# Altium PCB Voiture.PcbDoc (part 1 of 2)
Units mm, origin at the board's own origin, x right, y up, seen from the top; angles counter-clockwise.
Board outline 152.4 x 101.6 mm, 2 copper layers (Top Layer, Bottom Layer); 202 components, 170 nets, 599 pads, 88 vias.
Unrouted connection lines stored in the file: 12.
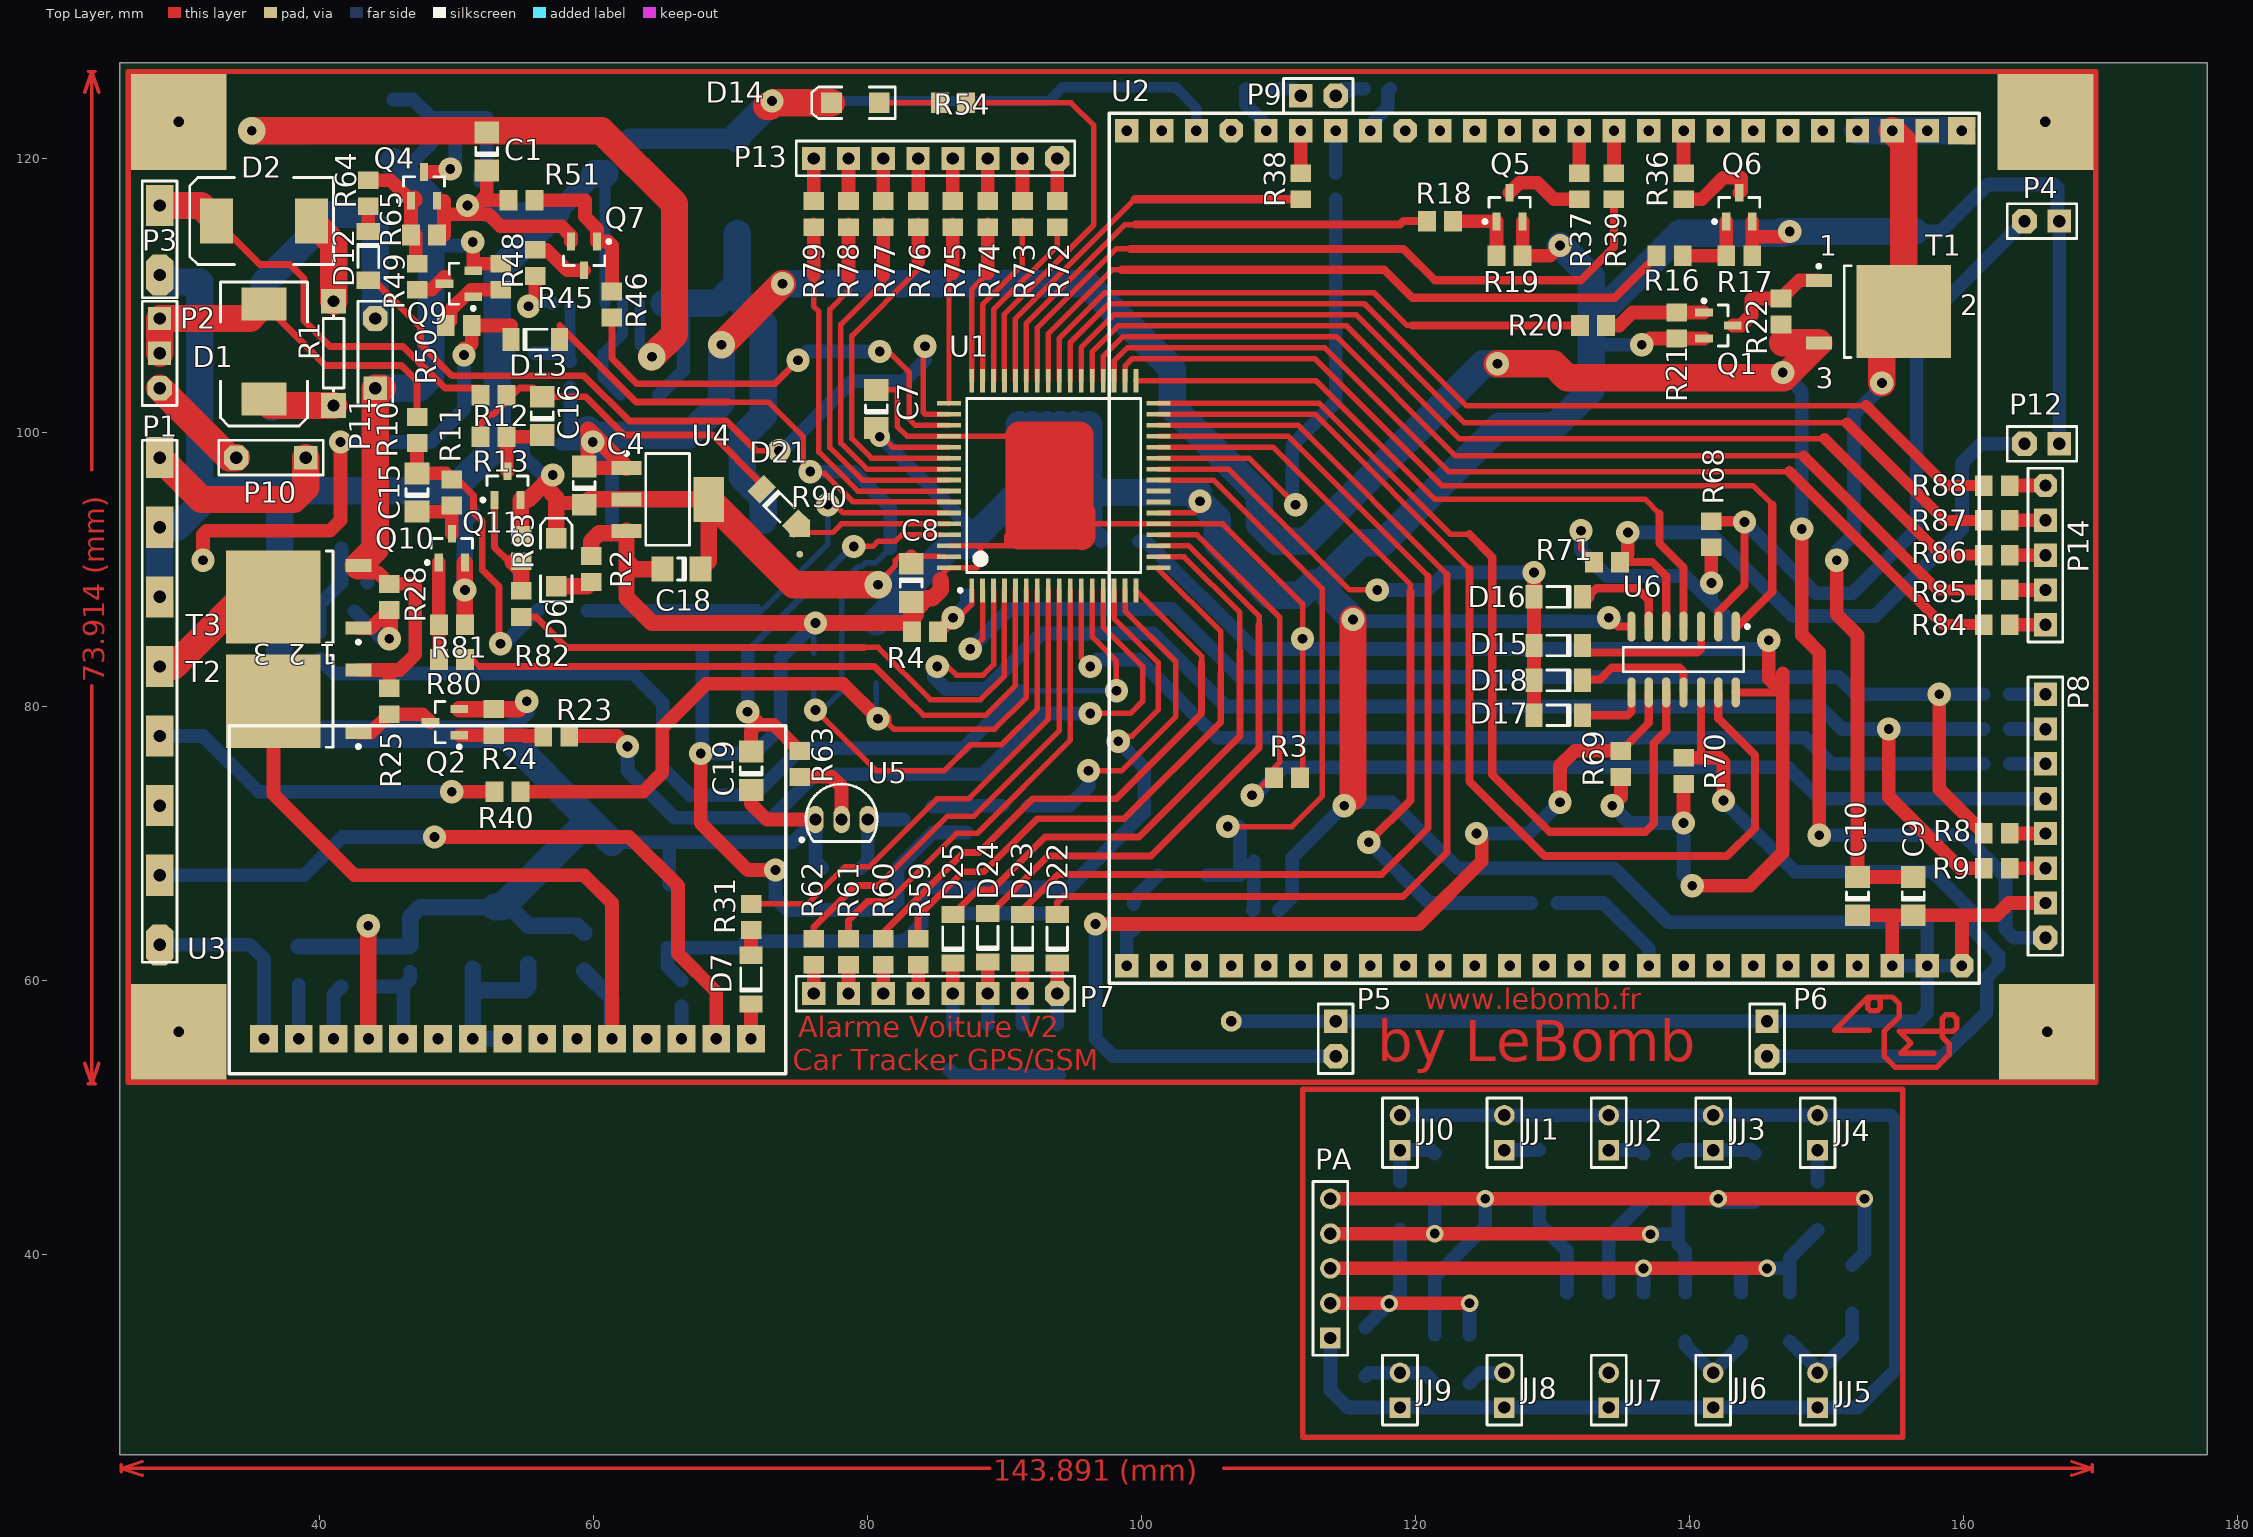
[diagram p0: Top Layer view]
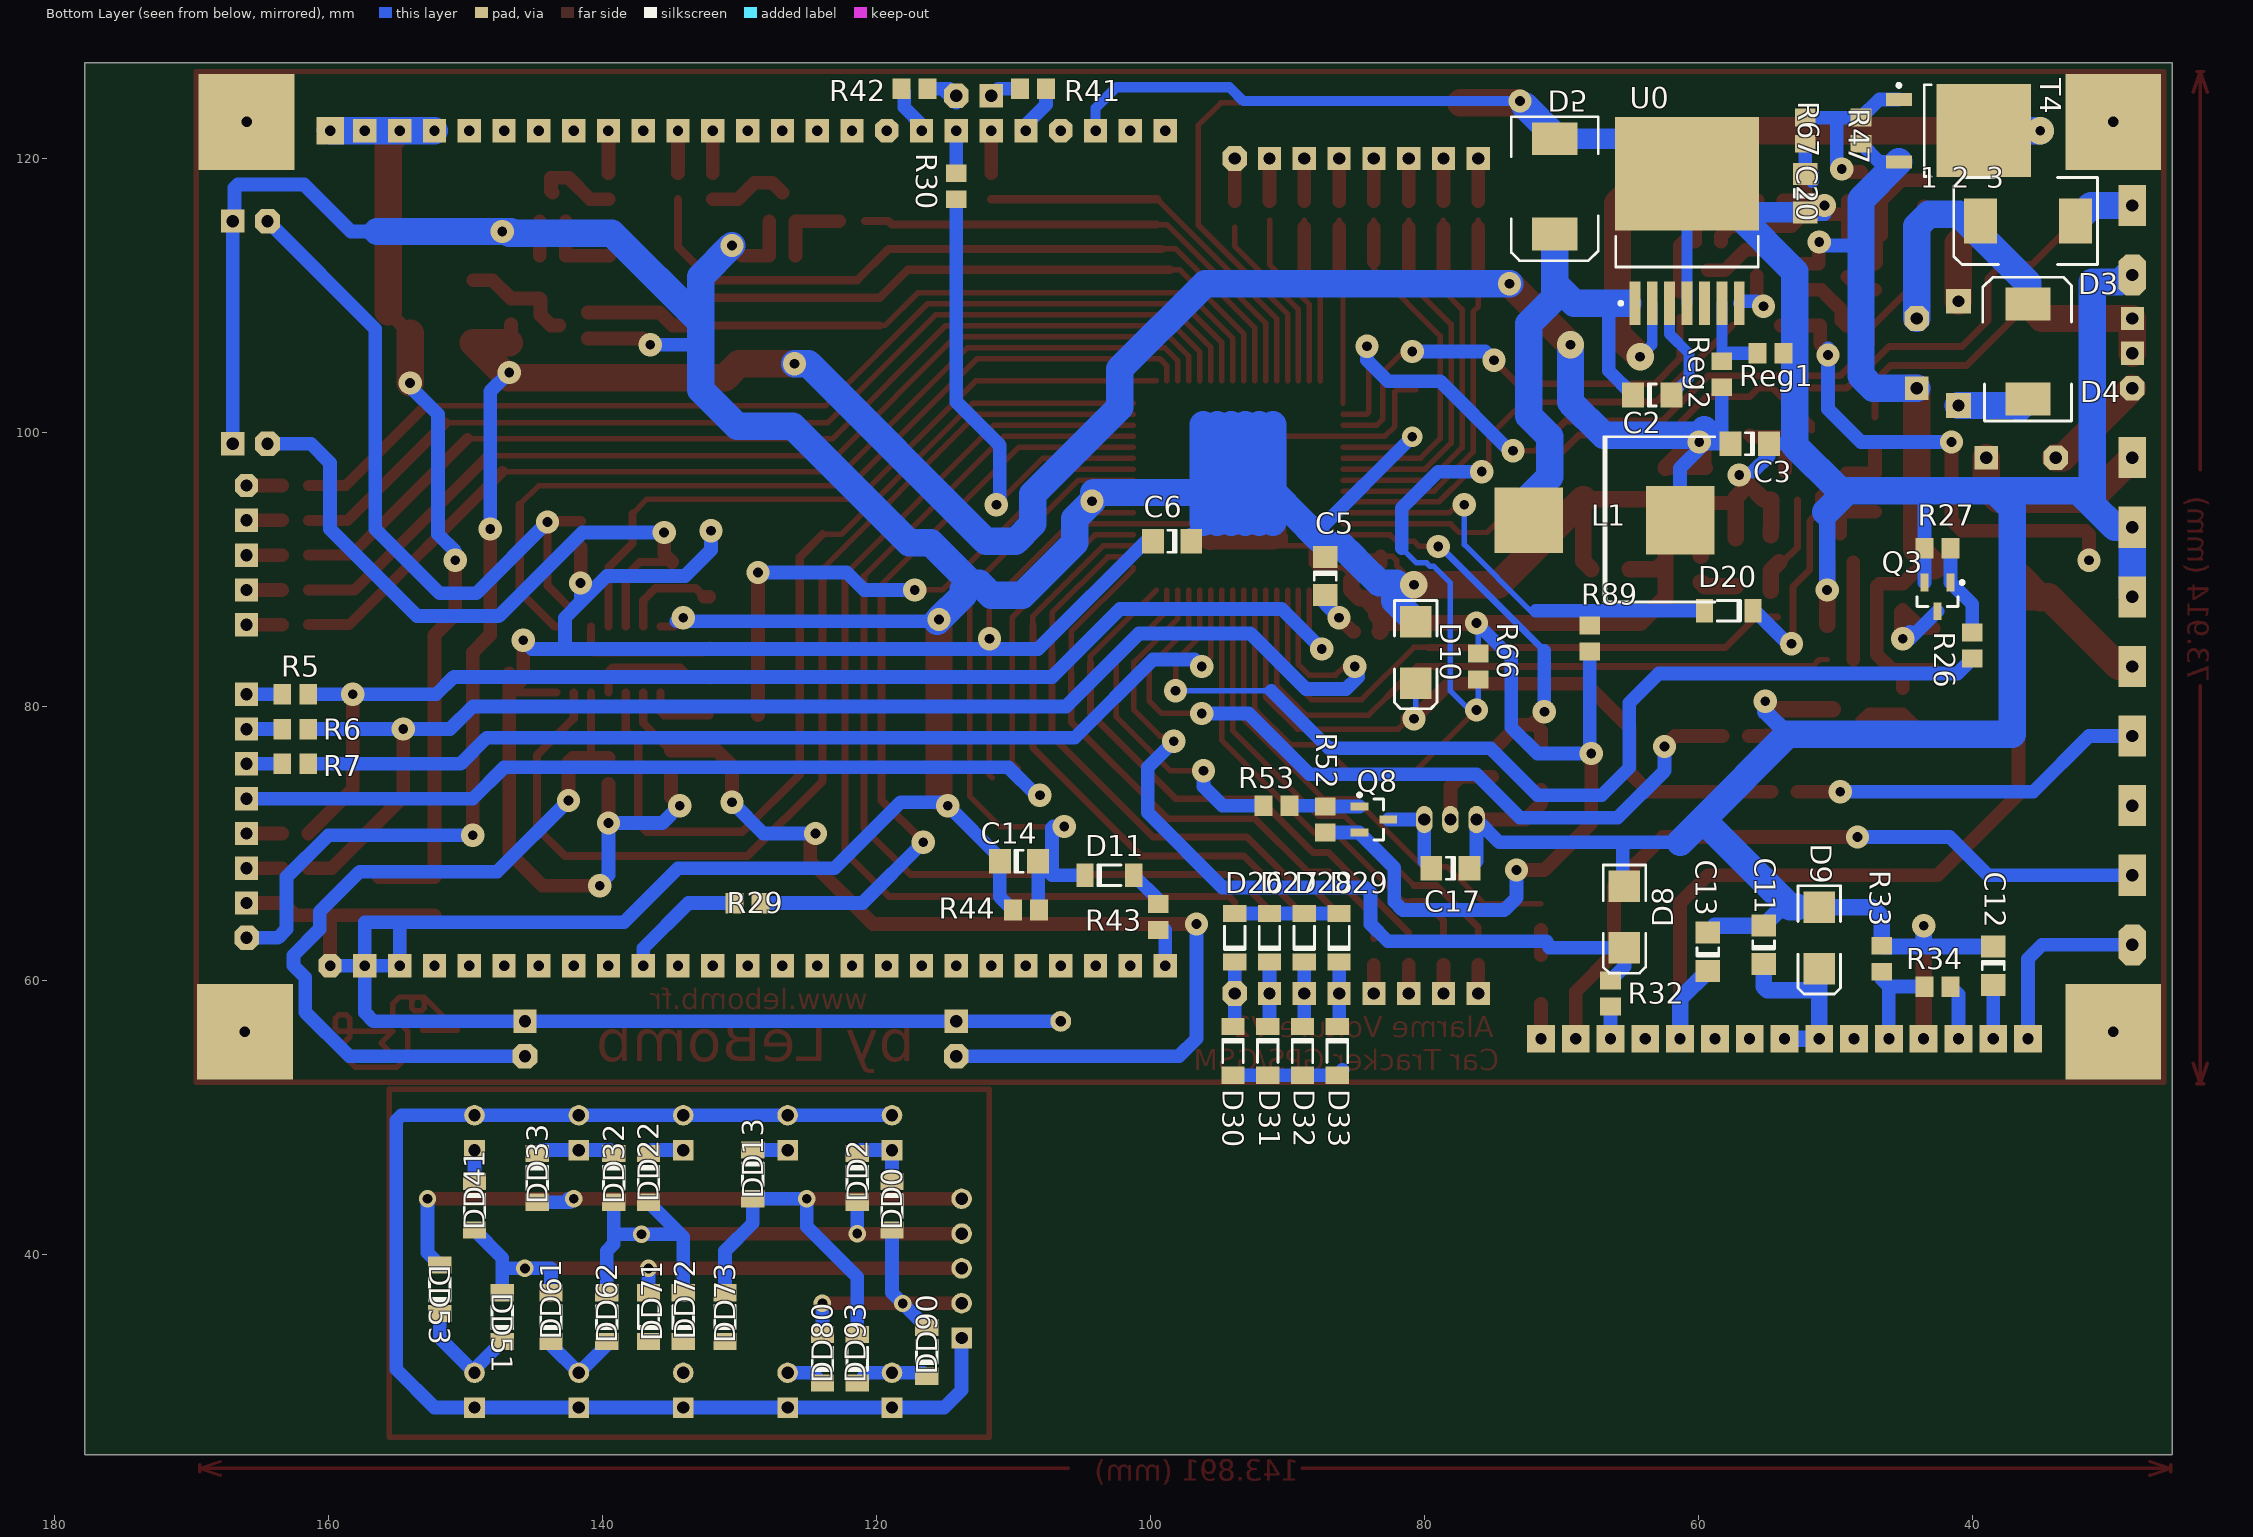
[diagram p1: Bottom Layer view, seen from below]

## Layer stack, top to bottom
Top Layer: signal copper 0.0356
Dielectric: dielectric 0.32, FR-4, Dk 4.8
Bottom Layer: signal copper 0.0356

## Board outline
25.4,25.4 177.8,25.4 177.8,127 25.4,127

## Design rules (kind name [scope] priority, off if disabled: settings)
Clearance [All] p1: gap=0.4
ComponentClearance [All] p1 off: gap=0.254 collisioncheckmode=3 verticalgap=0.254 showdistances=FALSE
PolygonConnect [All] p1: connectstyle=Relief reliefconductorwidth=0.254 reliefentries=4 polygonreliefangle="90 Angle"
RoutingVias [All] p1: holewidth=0.711 width=1.6 viastyle="Through Hole" minholewidth=0.711 minwidth=1.27 maxholewidth=0.711 maxwidth=2
SilkToSilkClearance [All] p1 off: silktosilkclearance=0.254
SilkscreenOverComponentPads [All] p1 off: minsilkscreentomaskgap=0.254
SolderMaskExpansion [All] p1: expansion=0.102
TestPointUsage [All] p1: valid=0 allowmultiple=FALSE
Testpoint [All] p1: side=15 testpointundercomponent=TRUE minsize=1.016 maxsize=2.54 preferedsize=1.524 minholesize=0 maxholesize=1.016 preferedholesize=0.813 testpointgrid=0.025 style=1023 order=0-112345678
Width [All] p1: maxlimit=2 minlimit=0.4 preferedwidth=0.5
21 further rules are at their usual default settings.

## Classes and differential pairs
component class Voiture: C1 C2 C3 C4 C5 C6 C7 C8 C9 C10 C11 C12 C13 C14 C15 C16 C17 C18 C19 C20 D1 D2 D3 D4 D5 D6 D7 D8 D9 D10 D11 D12 D13 D14 D15 D16 D17 D18 D20 D21 D22 D23 D24 D25 D26 D27 D28 D29 D30 D31 D32 D33 L1 P1 P2 P3 P4 P5 P6 P7 P8 P9 P10 P11 P12 P13 P14 Q1 Q2 Q3 Q4 Q5 Q6 Q7 Q8 Q9 Q10 Q11 R1 R2 R3 R4 R5 R6 R7 R8 R9 R10 R11 R12 R13 R16 R17 R18 R19 R20 R21 R22 R23 R24 R25 R26 R27 R28 R29 R30 R31 R32 R33 R34 R36 R37 R38 R39 R40 R41 R42 R43 R44 R45 R46 R47 R48 R49 R50 R51 R52 R53 R54 R59 R60 R61 R62 R63 R64 R65 R66 R67 R68 R69 R70 R71 R72 R73 R74 R75 R76 R77 R78 R79 R80 R81 R82 R83 R84 R85 R86 R87 R88 R89 R90 Reg1 Reg2 T1 T2 T3 T4 U0 U1 U2 U3 U4 U5 U6
component class Clavier: DD0 DD2 DD13 DD22 DD32 DD33 DD41 DD51 DD53 DD61 DD62 DD71 DD72 DD73 DD80 DD90 DD93 JJ0 JJ1 JJ2 JJ3 JJ4 JJ5 JJ6 JJ7 JJ8 JJ9 PA

## Components (designator, comment, footprint, x,y, rotation, side; value= is the part's Value field where it differs from the comment)
C1 "Cap 100nF" C1206 52.197,120.523 r90 top
C2 "Cap 10nF" C1206 63.373,102.743 r180 bottom
C3 "Cap 100nF" C1206 56.261,99.187 r0 bottom
C4 "Cap 100nF" C1206 59.309,96.139 r90 top
C5 "Cap 100nF" C1206 87.249,89.535 r270 bottom
C6 "Cap 100nF" C1206 98.425,92.075 r0 bottom
C7 "Cap 100nF" C1206 80.645,101.727 r90 top
C8 "Cap 100nF" C1206 83.185,89.027 r270 top
C9 "Cap 100nF" C1206 156.337,66.167 r90 top
C10 "Cap 100nF" C1206 152.273,66.167 r90 top
C11 "Cap 10uF" C1206 55.245,62.611 r90 bottom
C12 "Cap 10uF" C1206 38.481,61.087 r270 bottom
C13 "Cap 100nF" C1206 59.309,62.103 r90 bottom
C14 "Cap 10nF" C1206 109.601,68.707 r180 bottom
C15 "Cap 100nF" C1206 47.117,95.631 r90 top
C16 "Cap 100nF" C1206 56.261,101.219 r90 top
C17 "Cap 100nF" C1206 78.105,68.199 r0 bottom
C18 "Cap 100nF" C1206 66.421,90.043 r180 top
C19 "Cap 100nF" C1206 71.501,75.311 r90 top
C20 "Cap 100nF" C1206 52.197,117.475 r90 bottom
D1 "Diode Power" SMC 35.941,105.918 r270 top
D2 "Diode Power" SMC 35.941,115.443 r180 top
D3 "Diode Power" SMC 35.941,115.443 r0 bottom
D4 "Diode Power" SMC 35.941,105.918 r90 bottom
D5 "Diode Power" SMC 70.485,117.983 r270 bottom
D6 "LED" 3.2X1.6X1.1 57.277,90.551 r90 top
D7 "BAV103" SOD80C 71.501,60.071 r270 top
D8 "Diode Zener 3.0V" SMB 65.405,64.643 r270 bottom
D9 "Diode Zener 5.1V" SMB 51.181,63.119 r270 bottom
D10 "Diode Zener 3.0V" SMB 80.645,83.947 r270 bottom
D11 "BAV103" SOD80C 102.997,67.691 r0 bottom
D12 "BAV103" SOD80C 43.561,112.903 r90 top
D13 "NC" SOD80C 55.753,106.807 r180 top
D14 "LED" 3.2X1.6X1.1 79.121,124.079 r180 top
D15 "BAV103" SOD80C 130.429,84.455 r0 top
D16 "BAV103" SOD80C 130.429,88.011 r0 top
D17 "BAV103" SOD80C 130.429,79.375 r0 top
D18 "BAV103" SOD80C 130.429,81.915 r0 top
D20 "BAV103" SOD80C 57.785,86.995 r180 bottom
D21 "BAV103" SOD80C 73.533,94.615 r135 top
D22 "BAV103" SOD80C 93.853,63.053 r270 top
D23 "BAV103" SOD80C 91.313,63.053 r270 top
D24 "BAV103" SOD80C 88.773,63.119 r270 top
D25 "BAV103" SOD80C 86.233,63.053 r270 top
D26 "BAV103" SOD80C 93.853,63.119 r270 bottom
D27 "BAV103" SOD80C 91.313,63.119 r270 bottom
D28 "BAV103" SOD80C 88.773,63.119 r270 bottom
D29 "BAV103" SOD80C 86.233,63.119 r270 bottom
D30 "BAV103" SOD80C 93.98,54.864 r90 bottom
D31 "BAV103" SOD80C 91.44,54.864 r90 bottom
D32 "BAV103" SOD80C 88.9,54.864 r90 bottom
D33 "BAV103" SOD80C 86.36,54.864 r90 bottom
DD0 "BAV103" SOD80C 118.872,43.561 r90 bottom
DD2 "BAV103" SOD80C 121.412,45.593 r90 bottom
DD13 "BAV103" SOD80C 129.032,45.85 r90 bottom
DD22 "BAV103" SOD80C 136.652,45.593 r90 bottom
DD32 "BAV103" SOD80C 139.192,45.593 r90 bottom
DD33 "BAV103" SOD80C 144.78,45.593 r90 bottom
DD41 "BAV103" SOD80C 149.352,43.561 r90 bottom
DD51 "BAV103" SOD80C 147.32,35.433 r270 bottom
DD53 "BAV103" SOD80C 151.892,37.465 r270 bottom
DD61 "BAV103" SOD80C 143.764,35.433 r270 bottom
DD62 "BAV103" SOD80C 139.7,35.433 r270 bottom
DD71 "BAV103" SOD80C 136.652,35.433 r270 bottom
DD72 "BAV103" SOD80C 134.112,35.433 r270 bottom
DD73 "BAV103" SOD80C 131.064,35.433 r270 bottom
DD80 "BAV103" SOD80C 123.952,32.385 r270 bottom
DD90 "BAV103" SOD80C 116.332,32.893 r270 bottom
DD93 "BAV103" SOD80C 121.412,32.385 r270 bottom
JJ0 "Touch" HDR1X2#1 118.872,47.625 r90 top
JJ1 "Touch" HDR1X2#1 126.492,47.625 r90 top
JJ2 "Touch" HDR1X2#1 134.112,47.625 r90 top
JJ3 "Touch" HDR1X2#1 141.732,47.625 r90 top
JJ4 "Touch" HDR1X2#1 149.352,47.625 r90 top
JJ5 "Touch" HDR1X2#1 149.352,28.829 r90 top
JJ6 "Touch" HDR1X2#1 141.732,28.829 r90 top
JJ7 "Touch" HDR1X2#1 134.112,28.829 r90 top
JJ8 "Touch" HDR1X2#1 126.492,28.829 r90 top
JJ9 "Touch" HDR1X2#1 118.872,28.829 r90 top
L1 "Inductor" 4564_Chip 65.913,93.599 r180 bottom
P1 "Con All" HDR1X8#1 28.321,80.391 r90 top
P2 "Interrupteur" HDR1X3 28.321,103.251 r90 top
P3 "Con Batt" HDR1X2#2 28.321,112.903 r90 top
P4 "Con Tulipe 2" HDR1X2#3 164.465,115.443 r0 top
P5 "Con Tulipe 2" HDR1X2#3 114.173,54.483 r90 top
P6 "Con Tulipe 2" HDR1X2#3 145.669,54.483 r90 top
P7 "Con Tulipe 8" HDR1X8#2 93.853,59.055 r180 top
P8 "Con Tulipe 8" HDR1X8#2 165.989,63.119 r90 top
P9 "Con Tulipe 2" HDR1X2#3 114.173,124.587 r180 top
P10 "Fuse" HDR1X2#4 33.909,98.171 r0 top
P11 "Fuse" HDR1X2#4 44.069,108.331 r270 top
P12 "Con Tulipe 2" HDR1X2#3 164.465,99.187 r0 top
P13 "Con Tulipe 8" HDR1X8#2 93.853,120.015 r180 top
P14 "Header 5" HDR1X5#1 165.989,96.139 r270 top
PA "Header 5" HDR1X5#2 113.792,33.909 r90 top
Q1 "BSS123" SOT23_N 142.113,107.823 r0 top
Q2 "BSS123" SOT23_N 49.149,78.867 r180 top
Q3 "BSS123" SOT23_N 42.545,88.011 r270 bottom
Q4 "BSS123" SOT23_N 47.625,117.983 r90 top
Q5 "BSS123" SOT23_N 126.873,116.459 r90 top
Q6 "BSS123" SOT23_N 143.637,116.459 r90 top
Q7 "BSS123" SOT23_N 59.309,112.903 r270 top
Q8 "BSS84" SOT23_N 83.693,71.755 r180 bottom
Q9 "BSS84" SOT23_N 50.165,110.871 r180 top
Q10 "BSS123" SOT23_N 49.657,91.567 r90 top
Q11 "BSS123" SOT23_N 53.721,96.139 r90 top
R1 "Res1" AXIAL-0.3 41.021,105.791 r90 top
R2 "Res Semi" 2012[0805]#1 59.817,90.043 r90 top
R3 "Res Semi" 2012[0805]#1 110.617,74.803 r0 top
R4 "Res Semi" 2012[0805]#1 84.201,85.471 r180 top
R5 "Res Semi" 2012[0805]#1 162.433,80.899 r0 bottom
R6 "Res Semi" 2012[0805]#1 162.433,78.359 r0 bottom
R7 "Res Semi" 2012[0805]#1 162.433,75.819 r0 bottom
R8 "Res Semi" 2012[0805]#1 162.433,70.739 r0 top
R9 "Res Semi" 2012[0805]#1 162.433,68.199 r0 top
R10 "Res Semi" 2012[0805]#1 47.117,100.203 r270 top
R11 "Res Semi" 2012[0805]#1 49.657,95.631 r270 top
R12 "Res Semi" 2012[0805]#1 52.705,102.743 r0 top
R13 "Res Semi" 2012[0805]#1 52.705,99.695 r0 top
R16 "Res Semi" 2012[0805]#1 138.557,112.903 r180 top
R17 "Res Semi" 2012[0805]#1 143.637,112.903 r180 top
R18 "Res Semi" 2012[0805]#1 121.793,115.443 r180 top
R19 "Res Semi" 2012[0805]#1 126.873,112.903 r180 top
R20 "Res Semi" 2012[0805]#1 132.969,107.823 r180 top
R21 "Res Semi" 2012[0805]#1 139.065,107.823 r90 top
R22 "Res Semi" 2012[0805]#1 146.685,108.839 r90 top
R23 "Res Semi" 2012[0805]#1 57.277,77.851 r0 top
R24 "Res Semi" 2012[0805]#1 52.705,78.867 r90 top
R25 "Res Semi" 2012[0805]#1 45.085,80.391 r270 top
R26 "Res Semi" 2012[0805]#1 40.005,84.455 r270 bottom
R27 "Res Semi" 2012[0805]#1 42.545,91.567 r0 bottom
R28 "Res Semi" 2012[0805]#1 45.085,88.011 r270 top
R29 "Res Semi" 2012[0805]#1 129.413,65.659 r0 bottom
R30 "Res Semi" 2012[0805]#1 114.173,117.983 r90 bottom
R31 "Res Semi" 2012[0805]#1 71.501,64.643 r270 top
R32 "Res Semi" 2012[0805]#1 66.421,59.055 r270 bottom
R33 "Res Semi" 2012[0805]#1 46.609,61.595 r90 bottom
R34 "Res Semi" 2012[0805]#1 42.545,59.563 r180 bottom
R36 "Res Semi" 2012[0805]#1 139.573,117.983 r270 top
R37 "Res Semi" 2012[0805]#1 131.953,117.983 r270 top
R38 "Res Semi" 2012[0805]#1 111.633,117.983 r270 top
R39 "Res Semi" 2012[0805]#1 134.493,117.983 r270 top
R40 "Res Semi" 2012[0805]#1 53.721,73.787 r180 top
R41 "Res Semi" 2012[0805]#1 108.585,125.095 r0 bottom
R42 "Res Semi" 2012[0805]#1 117.221,125.095 r180 bottom
R43 "Res Semi" 2012[0805]#1 99.441,64.643 r270 bottom
R44 "Res Semi" 2012[0805]#1 109.093,65.151 r0 bottom
R45 "Res Semi" 2012[0805]#1 55.753,112.395 r270 top
R46 "Res Semi" 2012[0805]#1 61.341,109.347 r270 top
R47 "Res Semi" 2012[0805]#1 48.133,122.047 r90 bottom
R48 "Res Semi" 2012[0805]#1 53.213,111.379 r270 top
R49 "Res Semi" 2012[0805]#1 47.117,111.379 r270 top
R50 "Res Semi" 2012[0805]#1 50.165,107.823 r0 top
R51 "Res Semi" 2012[0805]#1 54.737,116.967 r0 top
R52 "Res Semi" 2012[0805]#1 87.249,71.755 r270 bottom
R53 "Res Semi" 2012[0805]#1 90.805,72.771 r180 bottom
R54 "Res Semi" 2012[0805]#1 86.233,124.079 r0 top
R59 "Res Semi" 2012[0805]#1 83.693,62.103 r270 top
R60 "Res Semi" 2012[0805]#1 81.153,62.103 r270 top
R61 "Res Semi" 2012[0805]#1 78.613,62.103 r270 top
R62 "Res Semi" 2012[0805]#1 76.073,62.103 r270 top
R63 "Res Semi" 2012[0805]#1 75.057,75.819 r90 top
R64 "Res Semi" 2012[0805]#1 43.561,117.475 r90 top
R65 "Res Semi" 2012[0805]#1 47.625,114.427 r180 top
R66 "Res Semi" 2012[0805]#1 76.073,82.931 r90 bottom
R67 "Res Semi" 2012[0805]#1 52.197,122.047 r90 bottom
R68 "Res Semi" 2012[0805]#1 141.605,92.583 r270 top
R69 "Res Semi" 2012[0805]#1 135.001,75.819 r270 top
R70 "Res Semi" 2012[0805]#1 139.573,75.311 r270 top
R71 "Res Semi" 2012[0805]#1 133.985,90.551 r180 top
R72 "Res Semi" 2012[0805]#1 93.853,115.951 r90 top
R73 "Res Semi" 2012[0805]#1 91.313,115.951 r90 top
R74 "Res Semi" 2012[0805]#1 88.773,115.951 r90 top
R75 "Res Semi" 2012[0805]#1 86.233,115.951 r90 top
R76 "Res Semi" 2012[0805]#1 83.693,115.951 r90 top
R77 "Res Semi" 2012[0805]#1 81.153,115.951 r90 top
R78 "Res Semi" 2012[0805]#1 78.613,115.951 r90 top
R79 "Res Semi" 2012[0805]#1 76.073,115.951 r90 top
R80 "Res Semi" 2012[0805]#1 49.657,83.439 r0 top
R81 "Res Semi" 2012[0805]#1 49.657,85.979 r0 top
R82 "Res Semi" 2012[0805]#1 54.737,87.503 r270 top
R83 "Res Semi" 2012[0805]#1 54.737,91.567 r90 top
R84 "Res Semi" 2012[0805]#1 162.433,85.979 r0 top
R85 "Res Semi" 2012[0805]#1 162.433,88.519 r0 top
R86 "Res Semi" 2012[0805]#1 162.433,91.059 r0 top
R87 "Res Semi" 2012[0805]#1 162.433,93.599 r0 top
R88 "Res Semi" 2012[0805]#1 162.433,96.139 r0 top
R89 "Res Semi" 2012[0805]#1 67.945,84.963 r270 bottom
R90 "Res Semi" 2012[0805]#2 75.057,92.075 r270 top
Reg1 "Res Semi" 2012[0805]#1 54.737,105.791 r180 bottom
Reg2 "Res Semi" 2012[0805]#1 58.293,104.267 r90 bottom
T1 "MTP2955V" TO228P970-3_4N 153.797,108.839 r0 top
T2 "MTP2955V" TO228P970-3_4N 38.481,80.391 r180 top
T3 "MTP2955V" TO228P970-3_4N 38.481,88.011 r180 top
T4 "MTP2955V" TO228P970-3_4N 41.021,122.047 r180 bottom
U0 "LM2676S-ADJ" TS7B_N 60.833,115.443 r90 bottom
U1 "ATmega128L-8AI" 64A_N 93.599,96.139 r90 top
U2 "GM862-GPS" GM862-GPS 129.413,91.567 r90 top
U3 "UTR2" utr2 35.941,55.753 r0 top
U4 "MCP1825S-2502E/DB" SOT-223-DB3_N 65.405,95.123 r0 top
U5 "LM19CIZ" Z03A 78.105,71.755 r270 top
U6 "SN74LVC86AD" D014_N 139.573,83.439 r270 top

## Footprints (in the part's own frame and the unit in brackets; to place one, negate y for a bottom-side part, rotate by r counter-clockwise, add the part's x,y. Pads: shape width x height; smd on the part's side, far side on the other; paste and mask are expansions set on the pad)
3.2X1.6X1.1 [mm] "SMT LED; 2 Flat Leads"
  rect 1.5x1.5 smd: 1(-1.75,0) 2(1.75,0)
  silkscreen extent -2.9,-1.15 3.2,1.15
64A_N [mm] "Thin QFP, 64-Leads, Body 14x14mm, Pitch 0.8mm, IPC Medium Density"
  rect 1.75x0.34 smd: 1(-7.65,6) 2(-7.65,5.2) 3(-7.65,4.4) 4(-7.65,3.6) 5(-7.65,2.8) 6(-7.65,2) 7(-7.65,1.2) 8(-7.65,0.4) 9(-7.65,-0.4) 10(-7.65,-1.2) 11(-7.65,-2) 12(-7.65,-2.8) 13(-7.65,-3.6) 14(-7.65,-4.4) 15(-7.65,-5.2) 16(-7.65,-6) 33(7.65,-6) 34(7.65,-5.2) 35(7.65,-4.4) 36(7.65,-3.6) 37(7.65,-2.8) 38(7.65,-2) 39(7.65,-1.2) 40(7.65,-0.4) 41(7.65,0.4) 42(7.65,1.2) 43(7.65,2) 44(7.65,2.8) 45(7.65,3.6) 46(7.65,4.4) 47(7.65,5.2) 48(7.65,6)
  rect 0.34x1.75 smd: 17(-6,-7.65) 18(-5.2,-7.65) 19(-4.4,-7.65) 20(-3.6,-7.65) 21(-2.8,-7.65) 22(-2,-7.65) 23(-1.2,-7.65) 24(-0.4,-7.65) 25(0.4,-7.65) 26(1.2,-7.65) 27(2,-7.65) 28(2.8,-7.65) 29(3.6,-7.65) 30(4.4,-7.65) 31(5.2,-7.65) 32(6,-7.65) 49(6,7.65) 50(5.2,7.65) 51(4.4,7.65) 52(3.6,7.65) 53(2.8,7.65) 54(2,7.65) 55(1.2,7.65) 56(0.4,7.65) 57(-0.4,7.65) 58(-1.2,7.65) 59(-2,7.65) 60(-2.8,7.65) 61(-3.6,7.65) 62(-4.4,7.65) 63(-5.2,7.65) 64(-6,7.65)
  silkscreen extent -7.77,-6.35 6.35,6.95, body extent -7,-7 7,7, height 1.2
2012[0805]#1 [mm] "Chip Resistor; Body 2.0 x 1.3 mm (LxW typ)"
  rect 1.3x1.5 smd: 1(-0.95,0) 2(0.95,0)
2012[0805]#2 [mm] "Chip Resistor; Body 2.0 x 1.3 mm (LxW typ)"
  rect 1.3x1.5 smd: 1(-0.95,0)
  oct 0.5x0.5 smd: 2(0.95,0)
4564_Chip [mm] "4564 Chip; Chip Inductor; Body 4.5 x 6.4 mm (LxW typ)"
  rect 5x4.8 smd: 1(-6.477,0)
  rect 5x5 smd: 2(4.572,0)
  silkscreen extent -1,-5.97 7.11,6.1
AXIAL-0.3 [mm] "Resistor; 2 Leads"
  rect 1.8x1.8 hole 0.85: 1(-3.81,0) 2(3.81,0)
  silkscreen extent -2.77,-0.76 2.77,0.76
C1206 [mm] "Chip Capacitor; Body 3.2 x 1.6 mm (LxW typ)"
  rect 1.6x1.8 smd: 1(-1.4,0) 2(1.4,0)
  silkscreen extent -0.3,-0.8 0.3,0.8
D014_N [mm] "SOIC, 14-Leads, Body 8.7x3.9mm, Pitch 1.27mm, IPC Medium Density"
  oval 2.2x0.6 smd: 1(-2.4,3.81) 2(-2.4,2.54) 3(-2.4,1.27) 4(-2.4,0) 5(-2.4,-1.27) 6(-2.4,-2.54) 7(-2.4,-3.81) 8(2.4,-3.81) 9(2.4,-2.54) 10(2.4,-1.27) 11(2.4,0) 12(2.4,1.27) 13(2.4,2.54) 14(2.4,3.81)
  silkscreen extent -2.52,-4.4 0.9,4.79, body extent -1.95,-4.33 1.95,4.33, height 1.75
GM862-GPS [mm]
  rect 2x2 hole 0.762: 1(30.48,-30.48)
  oct 1.7x1.7 hole 0.762: 2(-30.48,-30.48) 33(30.48,10.16) 43(30.48,22.86)
  rect 1.7x1.7 hole 0.762: 3(30.48,-27.94) 4(-30.48,-27.94) 5(30.48,-25.4) 6(-30.48,-25.4) 7(30.48,-22.86) 8(-30.48,-22.86) 9(30.48,-20.32) 10(-30.48,-20.32) 11(30.48,-17.78) 12(-30.48,-17.78) 13(30.48,-15.24) 14(-30.48,-15.24) 15(30.48,-12.7) 16(-30.48,-12.7) 17(30.48,-10.16) 18(-30.48,-10.16) 19(30.48,-7.62) 20(-30.48,-7.62) 21(30.48,-5.08) 22(-30.48,-5.08) 23(30.48,-2.54) 24(-30.48,-2.54) 25(30.48,0) 26(-30.48,0) 27(30.48,2.54) 28(-30.48,2.54) 29(30.48,5.08) 30(-30.48,5.08) 31(30.48,7.62) 32(-30.48,7.62) 34(-30.48,10.16) 35(30.48,12.7) 36(-30.48,12.7) 37(30.48,15.24) 38(-30.48,15.24) 39(30.48,17.78) 40(-30.48,17.78) 41(30.48,20.32) 42(-30.48,20.32) 44(-30.48,22.86) 45(30.48,25.4) 46(-30.48,25.4) 47(30.48,27.94) 48(-30.48,27.94) 49(30.48,30.48) 50(-30.48,30.48)
  silkscreen extent -31.75,-31.75 31.75,31.75
HDR1X2#1 [mm] "Connector; Header; 2 Position"
  rect 1.5x1.5 hole 0.9: 1(0,0)
  round 1.5 hole 0.9: 2(2.54,0)
  silkscreen extent -1.27,-1.27 3.81,1.27
HDR1X2#2 [mm] "Connector; Header; 2 Position"
  oct 3x2 hole 0.9: 1(-1.397,0)
  rect 3x2 hole 0.9: 2(3.683,0)
  silkscreen extent -3.05,-1.27 5.46,1.27
HDR1X2#3 [mm] "Connector; Header; 2 Position"
  oct 1.8x1.8 hole 0.9: 1(0,0)
  rect 1.7x1.7 hole 0.9: 2(2.54,0)
  silkscreen extent -1.27,-1.27 3.81,1.27
HDR1X2#4 [mm] "Connector; Header; 2 Position"
  oct 1.8x1.8 hole 0.9: 1(0,0)
  rect 1.7x1.7 hole 0.9: 2(5.08,0)
  silkscreen extent -1.27,-1.27 6.35,1.27
HDR1X3 [mm] "Connector; Header; 3 Position"
  oct 1.8x1.8 hole 0.9: 1(0,0)
  rect 1.7x1.7 hole 0.9: 2(2.54,0) 3(5.08,0)
  silkscreen extent -1.27,-1.27 6.35,1.27
HDR1X5#1 [mm] "Connector; Header; 5 Position"
  oct 1.7x1.7 hole 0.9: 1(0,0)
  rect 1.7x1.7 hole 0.9: 2(2.54,0) 3(5.08,0) 4(7.62,0) 5(10.16,0)
  silkscreen extent -1.27,-1.27 11.43,1.27
HDR1X5#2 [mm] "Connector; Header; 5 Position"
  rect 1.5x1.5 hole 0.9: 1(0,0)
  round 1.5 hole 0.9: 2(2.54,0) 3(5.08,0) 4(7.62,0) 5(10.16,0)
  silkscreen extent -1.27,-1.27 11.43,1.27
HDR1X8#1 [mm] "Connector; Header; 8 Position"
  oct 3x2 hole 0.9: 1(-17.78,0)
  rect 3x2 hole 0.9: 2(-12.7,0) 3(-7.62,0) 4(-2.54,0) 5(2.54,0) 6(7.62,0) 7(12.7,0) 8(17.78,0)
  silkscreen extent -19.05,-1.27 19.05,1.27
HDR1X8#2 [mm] "Connector; Header; 8 Position"
  oct 1.8x1.8 hole 0.9: 1(0,0)
  rect 1.7x1.7 hole 0.9: 2(2.54,0) 3(5.08,0) 4(7.62,0) 5(10.16,0) 6(12.7,0) 7(15.24,0) 8(17.78,0)
  silkscreen extent -1.27,-1.27 19.05,1.27
SMB [mm] "DO-214-AA/SMB; 2 C-Bend Leads; Body 5.3 x 3.6 mm, inc. leads (LxW)"
  rect 2.3x2.3 smd: 1(-2.25,0) 2(2.25,0)
  silkscreen extent -3.8,-1.55 4.1,1.55
SMC [mm] "DO-214-AB/SMC; 2 C-Bend Leads; Body 7.9 x 5.9 mm, inc. leads (LxW)"
  rect 2.4x3.3 smd: 1(-3.475,0) 2(3.475,0)
  silkscreen extent -5.08,-3.18 5.42,3.18
SOD80C [mm] "Metal Electrode Face (MELF) Diode; Body 3.5 x 1.6 mm (LxDia)"
  rect 1.25x1.7 smd: 1(-1.775,0) 2(1.775,0)
  silkscreen extent -0.85,-0.75 0.85,0.75
SOT23_N [mm] "SOT23, 3-Leads, Body 2.9x1.3mm, Pitch 0.95mm, Lead Span 2.3mm, IPC Medium Density"
  rect 1.3x0.6 smd: 1(-1.05,0.95) 2(-1.05,-0.95) 3(1.05,0)
  silkscreen extent -1.17,-1.5 0.7,1.92, body extent -0.7,-1.5 0.7,1.5, height 1.1
SOT-223-DB3_N [mm] "SOT223, 4-Leads, Body 6.5x3.5mm, Pitch 2.3mm, Lead Span 7mm, IPC Medium Density"
  rect 2.2x1 smd: 1(-3,2.3) 2(-3,0) 3(-3,-2.3)
  rect 2.2x3.3 smd: 4(3,0)
  silkscreen extent -3.12,-3.35 1.6,3.47, body extent -1.85,-3.35 1.85,3.35, height 1.8
TO228P970-3_4N [mm] "D-PAK, 4-Leads, Body 6.1x6.5mm, Pitch 2.28mm, Lead Span 9.7mm, IPC Medium Density"
  rect 1.9x0.95 smd: 1(-4.35,2.28) 3(-4.35,-2.28)
  rect 6.9x6.8 smd: 4(1.85,0)
  silkscreen extent -4.47,-3.35 -2,3.43, body extent -2.5,-3.35 3.7,3.35, height 2.38
TS7B_N [mm] "D2-PAK, 8-Leads, Body 8.6x10.2mm, Pitch 1.27mm, Lead Span 14.1mm, IPC Medium Density"
  rect 3.2x0.8 smd: 1(-6,3.81) 2(-6,2.54) 3(-6,1.27) 4(-6,0) 5(-6,-1.27) 6(-6,-2.54) 7(-6,-3.81)
  rect 8.3x10.5 smd: 8(3.45,0)
  silkscreen extent -6.12,-5.2 -1.1,5.2, body extent -3.35,-5.2 6.05,5.2, height 4.64
utr2 [mil]
  rect 80x80 hole 32: 1(0,0) 2(100,0) 3(200,0) 4(300,0) 5(400,0) 6(500,0) 7(600,0) 8(700,0) 9(800,0) 10(900,0) 11(1000,0) 12(1100,0) 13(1200,0) 14(1300,0) 15(1400,0)
  silkscreen extent -100,-100 1500,900
Z03A [mm] "TO, Flat Index; 3 In-Line, Axial Leads; Body Dia. 5mm; Leads 0.55 x 0.50 mm (max)"
  oval 2x1.2 hole 0.9: 1(0,-1.905) 2(0,0) 3(0,1.905)
  silkscreen extent -2.6,-3.02 1.6,2.6, body extent -2.61,-2.61 1.6,2.61, height 5.2

## Part data
C1 C2 C3 C4 C5 C6 C7 C8 C9 C10 C11 C12 C13 C14 C15 C16 C17 C18 C19 C20: library part "Cap Semi", "Capacitor (Semiconductor SIM Model)"
D1 D2 D3 D4 D5 D7 D11 D12 D13 D15 D16 D17 D18: library part Diode, "Default Diode"
D6 D14: library part LED2, "Typical RED, GREEN, YELLOW, AMBER GaAs LED"
D8 D9 D10: library part "D Schottky", "Schottky Diode"
D20 D21 D22 D23 D24 D25 D26 D27 D28 D29 D30 D31 D32 D33 DD0 DD2 DD13 DD22 DD32 DD33 DD41 DD51 DD53 DD61 DD62 DD71 DD72 DD73 DD80 DD90 DD93: "General-purpose Diode"
JJ0 JJ1 JJ2 JJ3 JJ4 JJ5 JJ6 JJ7 JJ8 JJ9 P3 P4 P5 P6 P9 P10 P11 P12: library part "Header 2", "Header, 2-Pin"
P1 P7 P8 P13: library part "Header 8", "Header, 8-Pin"
P2: library part "Header 3", "Header, 3-Pin"
P14 PA: "Header, 5-Pin"
Q1 Q2 Q3 Q4 Q5 Q6 Q7 Q10 Q11: "N-channel Enhancement Mode Vertical D-MOSFET"
Q8 Q9: "P-channel Enhancement Mode Vertical D-MOSFET"
R1: library part "Res Semi", "Semiconductor Resistor"
R2 R3 R4 R5 R6 R7 R8 R9 R10 R11 R12 R13 R16 R17 R18 R19 R20 R21 R22 R23 R24 R25 R26 R27 R28 R29 R30 R31 R32 R33 R34 R36 R37 R38 R39 R40 R41 R42 R43 R44 R45 R46 R47 R48 R49 R50 R51 R52 R53 R54 R59 R60 R61 R62 R63 R64 R65 R66 R67 R68 R69 R70 R71 R72 R73 R74 R75 R76 R77 R78 R79 R80 R81 R82 R83 R84 R85 R86 R87 R88 R89 R90 Reg1 Reg2: "Semiconductor Resistor"
T1 T2 T3 T4: "TMOS V Power Field Effect Transistor"
U0: "SIMPLE SWITCHER High Efficiency 3A Step-Down Voltage Regulator"
U1: "8-Bit AVR Microcontroller with 128K Bytes of In-System Programmable Flash Memory"
U4: "500 mA, Low Voltage, Low Quiescent Current LDO Regulator, 3-Pin SOT-223, Extended Temperature"
U5: "2.4V, 10uA, TO-92 Temperature Sensor"
U6: library part SN74LVC86APW, "Quadruple 2-Input Exclusive-OR Gate"

## Free pads (board coordinates)
  rect 7x7 hole 0.762: 0(29.718,56.261) 0(29.718,122.682) 0(165.989,122.682) 0(166.116,56.261)
  round 1.524 hole 0.762: 1(106.553,57.023)

## Via types
v1: diameter 1.7, hole 0.711, Top Layer to Bottom Layer, 74 vias
v2: diameter 1.27, hole 0.711, Top Layer to Bottom Layer, 9 vias
v3: diameter 2, hole 0.711, Top Layer to Bottom Layer, 4 vias
v4: diameter 1.5, hole 0.711, Top Layer to Bottom Layer, 1 vias

## Nets (pads, with @x,y where several pads share a name; then routed paths per layer and width w, separated by ;. In a path a pad name is that pad's centre, name@x,y a point inside that pad or via, vN(x,y) a via of type N, cw(c..) or ccw(c..) an arc to the next point about the centre after c; other vN are vias at no path point)
3.0V: C6.2 C7.2 C8.2 C18.2 Q8.2 R2.2 R3.2 R4.2 R52.2 R66.2 R68.2 R69.2 R70.2 R71.2 R89.2 R90.2 U1.21 U1.52 U1.62 U1.64 U4.3 | length 310.6
  Top Layer w0.4: C7.2@80.645,103.127 82.039,103.127 82.169,102.997 82.169,100.457 82.887,99.739 U1.52@85.949,99.739 91.059,99.739 92.158,99.739 ; 85.344,89.239 85.344,89.534 U1.64@85.949,90.139 87.98,90.139 88.265,90.424 88.265,91.567 88.093,91.739 ; U1.62@85.949,91.739 88.093,91.739 ; 90.17,92.456 90.17,91.739 ; 91.757,91.757 91.739,91.739 90.17,91.739 ; 95.377,93.339 95.504,93.339 95.631,93.339 U1.21@101.249,93.339 105.924,93.339 111.76,87.503 111.76,84.201 111.76,74.996 R3.2@111.567,74.803 ; v1(132.08,92.837) 132.08,91.506 R71.2@133.035,90.551 ; 88.093,91.739 90.17,91.739
  Top Layer w0.6: 143.383,81.039 146.799,81.039
  Top Layer w1: v1(67.818,76.581) 67.818,71.501 71.247,68.072 ; 72.009,68.072 71.247,68.072 ; v1(73.279,68.072) 71.247,68.072 ; R4.2@82.931,86.106 83.251,85.786 R4.2@83.251,85.471 ; v1(134.366,72.771) 135.001,73.406 R69.2@135.001,74.869 ; v1(139.573,71.501) R70.2@139.573,74.361 ; v1(140.208,66.929) 144.399,66.929 146.812,69.342 146.812,82.423 ; v1(141.605,89.027) R68.2@141.605,91.633 ; v1(145.796,84.836) 145.796,82.042 146.799,81.039
  Top Layer w1.2: R2.2@59.817,90.993 59.817,92.075 60.401,92.659 U4.3@62.405,92.659 ; U4.3@62.405,92.823 U4.3@62.405,92.659 ; C18.2@65.021,90.043 62.992,90.043 62.405,90.63 ; C8.2@83.185,87.627 83.185,85.537 R4.2@83.251,85.471 ; 85.344,89.239 85.344,88.519 84.741,87.916 84.36,87.916 83.534,87.09 83.534,86.709 82.931,86.106 v1(76.2,86.106) 64.262,86.106 62.405,87.963 62.405,90.63 ; 62.405,90.63 U4.3@62.405,92.659
  Top Layer w2: 91.059,99.739 91.059,98.044 ; 91.059,99.822 95.504,99.822 95.504,98.044 ; 95.377,96.139 91.059,96.139 ; 95.631,92.45 95.631,93.339 95.631,94.107 95.504,94.234 ; 91.059,94.234 95.504,94.234 ; 91.059,94.234 91.059,96.139 ; 91.059,94.234 91.059,92.456 95.504,92.456 95.504,93.339 95.504,94.234 ; 91.059,96.139 91.059,98.044 ; 91.059,98.044 95.504,98.044 ; 95.504,94.234 95.504,98.044
  Bottom Layer w0.4: R66.2@76.073,83.881 76.073,85.979 v1(76.2,86.106)
  Bottom Layer w1: v1(67.818,76.581) 71.755,76.581 73.66,78.486 73.66,83.566 v1@76.073,85.979 ; v1@67.945,76.708 R89.2@67.945,84.013 ; v1(73.279,68.072) 73.279,66.04 74.168,65.151 81.595,65.151 82.2,65.755 82.2,68.23 84.775,70.805 R52.2@87.249,70.805 ; C6.2@99.825,92.075 100.33,92.075 108.204,84.201 142.748,84.201 ; v1(132.08,92.837) 132.08,91.44 133.985,89.535 139.7,89.535 141.605,87.63 ; v1(134.366,72.771) 135.636,71.501 v1(139.573,71.501) 139.573,67.691 140.208,67.056 v1(140.208,66.929) ; v1(141.605,89.027) 141.605,87.63 ; v1(145.796,84.836) 145.161,84.201 142.748,84.201 ; 141.605,87.63 142.748,86.487 142.748,84.201
  other v1: 111.76,84.963
3.8V: C3.2 C4.2 L1.2 P8.1 R22.1 Reg2.1 T1.3 U4.1 | length 199.3
  Top Layer w1: C4.2@59.425,97.423 C4.2@59.563,97.423 ; 59.625,100.203 59.563,100.203 C4.2@59.563,97.423 ; U4.1@62.405,97.423 C4.2@59.563,97.423 ; R22.1@146.685,107.889 146.685,106.692 146.818,106.559 ; v1(148.209,92.964) 148.209,85.217 149.479,83.947 v1(149.479,70.612)
  Top Layer w1.2: 59.625,100.203 U4.1@62.405,97.423
  Top Layer w2: v3(69.342,106.426) v1(73.787,110.871) ; v1(125.984,105.029) 130.048,105.029 131.064,104.013 146.901,104.013 T1.3@149.447,106.559 146.818,106.559
  Bottom Layer w1: Reg2.1@58.293,103.317 58.293,99.819 C3.2@57.661,99.187 C3.2@58.293,99.187 ; 59.563,100.203 59.309,100.203 C3.2@58.293,99.187 ; L1.2@61.341,93.599 61.341,97.409 59.563,99.187 C3.2@58.293,99.187 ; v1(146.812,104.394) 148.209,102.997 v1(148.209,92.964) ; v1(149.479,70.612) 160.02,70.612 163.068,67.564 163.068,63.754 163.703,63.119 165.481,63.119 P8.1@165.735,63.373
  Bottom Layer w2: 59.563,100.203 59.944,99.822 66.929,99.822 69.342,102.235 v3(69.342,106.426) ; v1(73.787,110.871) 96.012,110.871 102.235,104.648 102.235,101.854 108.585,95.504 108.585,93.345 109.855,92.075 112.014,92.075 124.968,105.029 v1(125.984,105.029)
  other v1: 59.944,99.314
/RST_UC: P8.5 R3.1 U1.20 | length 85.1
  Top Layer w0.4: U1.20@101.249,92.539 104.057,92.539 110.109,86.487 110.109,75.946 109.667,75.504 R3.1@109.667,74.803 109.347,74.803 v1(108.077,73.533)
  Bottom Layer w1: v1(108.077,73.533) 108.331,73.533 110.363,75.565 147.193,75.565 149.479,73.279 P8.5@165.989,73.279
ALARM_GSM: C14.2 D11.2 R44.1 U1.25 | length 50
  Top Layer w0.4: U1.25@101.249,96.539 105.264,96.539 113.21,88.593 113.21,73.459 110.998,71.247 v1(106.299,71.247)
  Bottom Layer w1: D11.2@104.772,67.691 107.185,67.691 ; v1(106.299,71.247) 107.079,71.247 107.185,71.141 107.185,67.691 ; R44.1@108.143,65.151 108.201,65.209 C14.2@108.201,68.707 107.185,67.691
ALIM_GSM: R20.2 U1.40 | length 43.5
  Top Layer w0.4: U1.40@93.999,103.789 93.999,106.895 97.314,110.21 116.993,110.21 119.38,107.823 119.761,107.823
  Top Layer w0.6: 119.761,107.823 R20.2@132.019,107.823
ALIM_SIRENE: R26.2 U1.12 | length 76.3
  Top Layer w0.4: U1.12@96.399,88.489 96.399,85.103 98.171,83.331 v1(98.171,81.153)
  Bottom Layer w0.4: 91.186,81.153 v1(98.171,81.153)
  Bottom Layer w1: R26.2@40.005,83.505 41.087,82.423 62.897,82.423 65.051,80.268 65.051,75.538 67.056,73.533 71.755,73.533 75.184,76.962 86.995,76.962 91.186,81.153
ALIM_TEMP: R53.1 U1.15 | length 24.9
  Top Layer w0.4: v1(96.139,75.311) 98.552,75.311 102.489,79.248 102.489,83.312 98.806,86.995 98.806,87.376 98.799,87.383 U1.15@98.799,88.489
  Bottom Layer w1: R53.1@91.755,72.771 94.742,72.771 96.139,74.168 v1(96.139,75.311)
ALIM_UC: D12.1 U1.50 | length 57.1
  Top Layer w0.4: 71.831,98.73 71.882,98.679 v1(73.533,98.679) ; v1(84.201,106.299) 84.074,106.172 84.074,101.473 84.208,101.339 U1.50@85.949,101.339
  Top Layer w0.5: D12.1@43.561,111.128 43.939,111.128 47.371,107.696 47.371,106.464 49.684,104.151 59.298,104.151 62.611,100.838 69.723,100.838 71.831,98.73
  Bottom Layer w1: v1(73.533,98.679) 73.787,98.679 78.867,103.759 82.677,103.759 84.201,105.283 v1(84.201,106.299)
ALIM_UTR2: R23.2 U1.13 | length 58.2
  Top Layer w0.4: v1(96.266,79.502) 99.187,79.502 100.076,80.391 100.076,82.931 97.199,85.808 U1.13@97.199,88.489
  Top Layer w1: R23.2@58.227,77.851 61.722,77.851 v1(62.484,77.089)
  Bottom Layer w1: v1(62.484,77.089) 62.484,75.311 65.913,71.882 73.025,71.882 76.2,75.057 88.392,75.057 92.837,79.502 v1(96.266,79.502)
ALIM_VOLT_BATT_SECOUR: R82.2 U1.4 | length 45.2
  Top Layer w0.4: 79.756,84.328 80.772,84.328 84.582,80.518 88.265,80.518 89.999,82.252 U1.4@89.999,88.489
  Top Layer w0.5: R82.2@54.229,86.553 R82.2@54.737,86.553 55.814,86.553 58.039,84.328 79.756,84.328
ALIM_VOLT_VOITURE: R80.2 U1.5 | length 49.7
  Top Layer w0.4: R80.2@50.607,83.439 51.181,83.439 51.689,82.931 ; 82.672,80.777 84.074,79.375 88.646,79.375 90.799,81.528 U1.5@90.799,88.489
  Top Layer w0.5: 51.689,82.931 80.518,82.931 82.672,80.777
CAPTEUR_NIVEAU: D15.1 D16.1 D17.1 D18.1 U1.26 | length 42.4
  Top Layer w0.4: U1.26@101.249,97.339 106.369,97.339 115.189,88.519 v1(117.221,88.519)
  Top Layer w1: v1(128.651,89.789) 128.654,89.786 128.654,86.995 D15.1@128.654,84.455 D18.1@128.654,81.915 D17.1@128.654,79.375
  Bottom Layer w0.4: v1(117.221,88.519) v1@117.475,88.265
  Bottom Layer w1: v1(117.221,88.519) 120.904,88.519 122.174,89.789 v1(128.651,89.789)
CAPTEUR_PORTIERE: D10.2 R40.1 U1.6 | length 54.5
  Top Layer w0.4: v1@81.534,79.248 81.534,78.74 81.915,78.359 89.281,78.359 91.599,80.677 U1.6@91.599,88.489
  Top Layer w1: R40.1@54.671,73.787 63.627,73.787 65.024,75.184 65.024,78.486 68.199,81.661 78.232,81.661 v1(80.772,79.121)
  Bottom Layer w0.4: D10.2@80.645,81.697 80.645,79.248 v1(80.772,79.121)
CAPTEUR_TEMP_BATT_SECOUR: C19.2 R63.2 U1.61 | length 29.3
  Top Layer w0.4: v1@79.248,91.694 80.391,91.694 80.772,92.075 82.042,92.075 82.506,92.539 U1.61@85.314,92.539
  Top Layer w1: v1(71.247,79.629) 71.943,78.933 71.943,78.674 ; C19.2@71.501,76.711 71.501,78.232 71.943,78.674 ; R63.2@75.057,76.769 73.152,78.674 71.943,78.674
  Bottom Layer w0.5: 71.247,84.074 78.867,91.694 v1(78.994,91.694) v1@79.248,91.694
  Bottom Layer w1: v1(71.247,79.629) 71.247,84.074
CAPTEUR_UTR2: R31.1 U1.8 | length 37.8
  Top Layer w0.4: R31.1@71.501,65.593 75.626,65.593 78.359,68.326 80.137,68.326 85.069,73.258 87.355,73.258 93.199,79.102 U1.8@93.199,88.489 93.199,87.395
CAPTEUR_VOLT_BATT_SECOUR: D21.1 R90.1 U1.60 | length 11.7
  Top Layer w0.4: D21.1@74.788,93.36 75.438,92.71 77.47,92.71 78.099,93.339 U1.60@85.949,93.339
CAPTEUR_VOLT_VOITURE: D20.1 R89.1 U1.59 | length 32.6
  Top Layer w0.4: v1(77.089,94.742) 77.597,94.742 78.2,94.139 U1.59@85.949,94.139
  Bottom Layer w0.4: 71.882,86.995 72.263,86.995 77.089,91.821 v1(77.089,94.742)
  Bottom Layer w0.5: R89.1@67.945,85.913 67.945,86.995
  Bottom Layer w1: D20.1@59.56,86.995 67.945,86.995 71.882,86.995
CODE_ON: D13.2 D26.1 D27.1 D28.1 D29.1 R50.2 | length 45.4
  Top Layer w1: v1(31.496,90.678) 31.496,92.583 31.75,92.837 40.767,92.837 41.529,93.599 v1(41.529,99.314) ; v1@50.546,106.172 50.546,105.932 50.553,105.925 51.115,106.487 R50.2@51.115,107.823 53.978,107.823
  Bottom Layer w1: v1(41.529,99.314) 48.133,99.314 50.546,101.727 v1(50.546,105.664) v1@50.546,106.172 ; D29.1@86.233,64.894 D28.1@88.773,64.894 D27.1@91.313,64.894 D26.1@93.853,64.894
CODE_ON_UC: D13.1 D30.1 D31.1 D32.1 D33.1 R66.1 U1.7 U1.58 | length 98.8
  Top Layer w0.4: 69.85,102.235 72.771,102.235 75.311,99.695 75.311,97.663 v1(75.819,97.155) 75.946,97.028 76.87,97.028 78.959,94.939 U1.58@85.949,94.939 ; v1(76.2,79.756) 80.645,75.311 85.598,75.311 87.503,77.216 89.789,77.216 92.399,79.826 U1.7@92.399,88.489
  Top Layer w0.5: 57.528,107.823 63.116,102.235 69.85,102.235
  Bottom Layer w0.4: R66.1@76.073,81.981 76.073,79.883 v1(76.2,79.756) 76.708,79.756 78.105,81.153 78.105,89.027 79.322,90.244 79.595,90.244 79.851,90.5 80.594,90.5 81.661,91.567
  Bottom Layer w1: v1(75.819,97.155) 78.994,97.155 81.661,94.488 81.661,91.567 ; D33.1@85.982,53.467 D33.1@86.36,53.089 D32.1@88.9,53.089 D31.1@91.44,53.089 D30.1@93.98,53.089
CONF_NIV0: U1.34 U6.1 | length 63.1
  Top Layer w0.4: U1.34@98.799,103.789 98.799,104.883 99.326,105.41 112.649,105.41 121.92,96.139 144.653,96.139 146.05,94.742
  Top Layer w0.6: U6.1@143.383,85.839 143.497,85.839 146.05,88.392 146.05,94.742
CONF_NIV1: U1.32 U6.10 | length 68.6
  Top Layer w0.4: U1.32@101.249,102.139 101.255,102.145 112.993,102.145 122.555,92.583 123.952,92.583
  Top Layer w0.6: 123.952,92.583 125.603,90.932 125.603,75.057 129.794,70.866 136.779,70.866 137.399,71.486 137.399,77.328 138.303,78.232 U6.10@138.303,81.039
CONF_NIV2: U1.31 U6.13 | length 77.8
  Top Layer w0.4: U1.31@101.249,101.339 102.689,101.339 102.695,101.345 112.65,101.345 123.952,90.043
  Top Layer w0.6: 123.952,90.043 123.952,74.549 129.413,69.088 142.748,69.088 144.78,71.12 144.78,76.454 142.113,79.121 U6.13@142.113,81.039
CONF_NIV3: U1.33 U6.4 | length 51.2
  Top Layer w0.4: U1.33@99.599,103.789 112.746,103.789 121.412,95.123 136.779,95.123 137.824,94.078
  Top Layer w0.6: 137.824,94.078 137.824,91.919 139.573,90.17 U6.4@139.573,85.839
ENABLE_GSM: R16.2 U1.41 | length 51.9
  Top Layer w0.4: U1.41@93.199,103.789 93.199,107.226 97.86,111.887 98.552,111.887
  Top Layer w0.6: 98.552,111.887 117.729,111.887 119.761,109.855 134.559,109.855 R16.2@137.607,112.903